# Altium PCB LCD PCB.PcbDoc
Units mm, origin at the board's own origin, x right, y up, seen from the top; angles counter-clockwise.
Board outline 100 x 62 mm, 2 copper layers (Top Layer, Bottom Layer), stack 1.621 mm thick; 2 components, 16 nets, 36 pads, 3 vias.
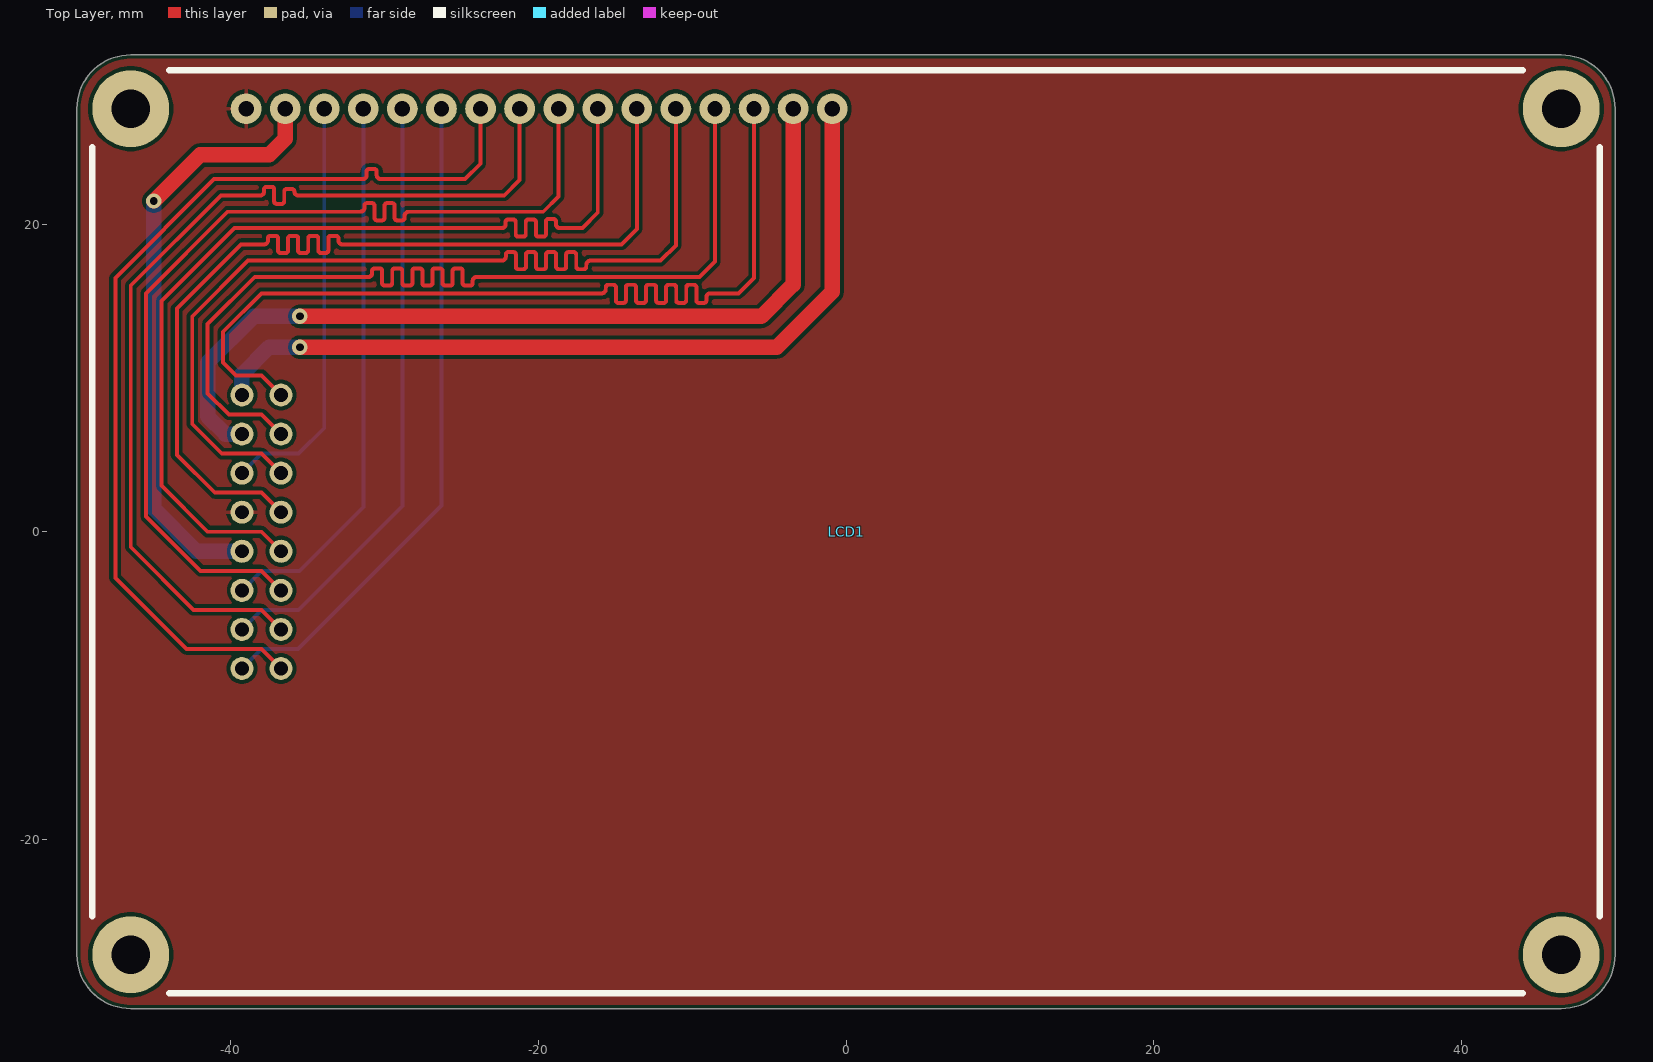
[diagram p0: Top Layer view]
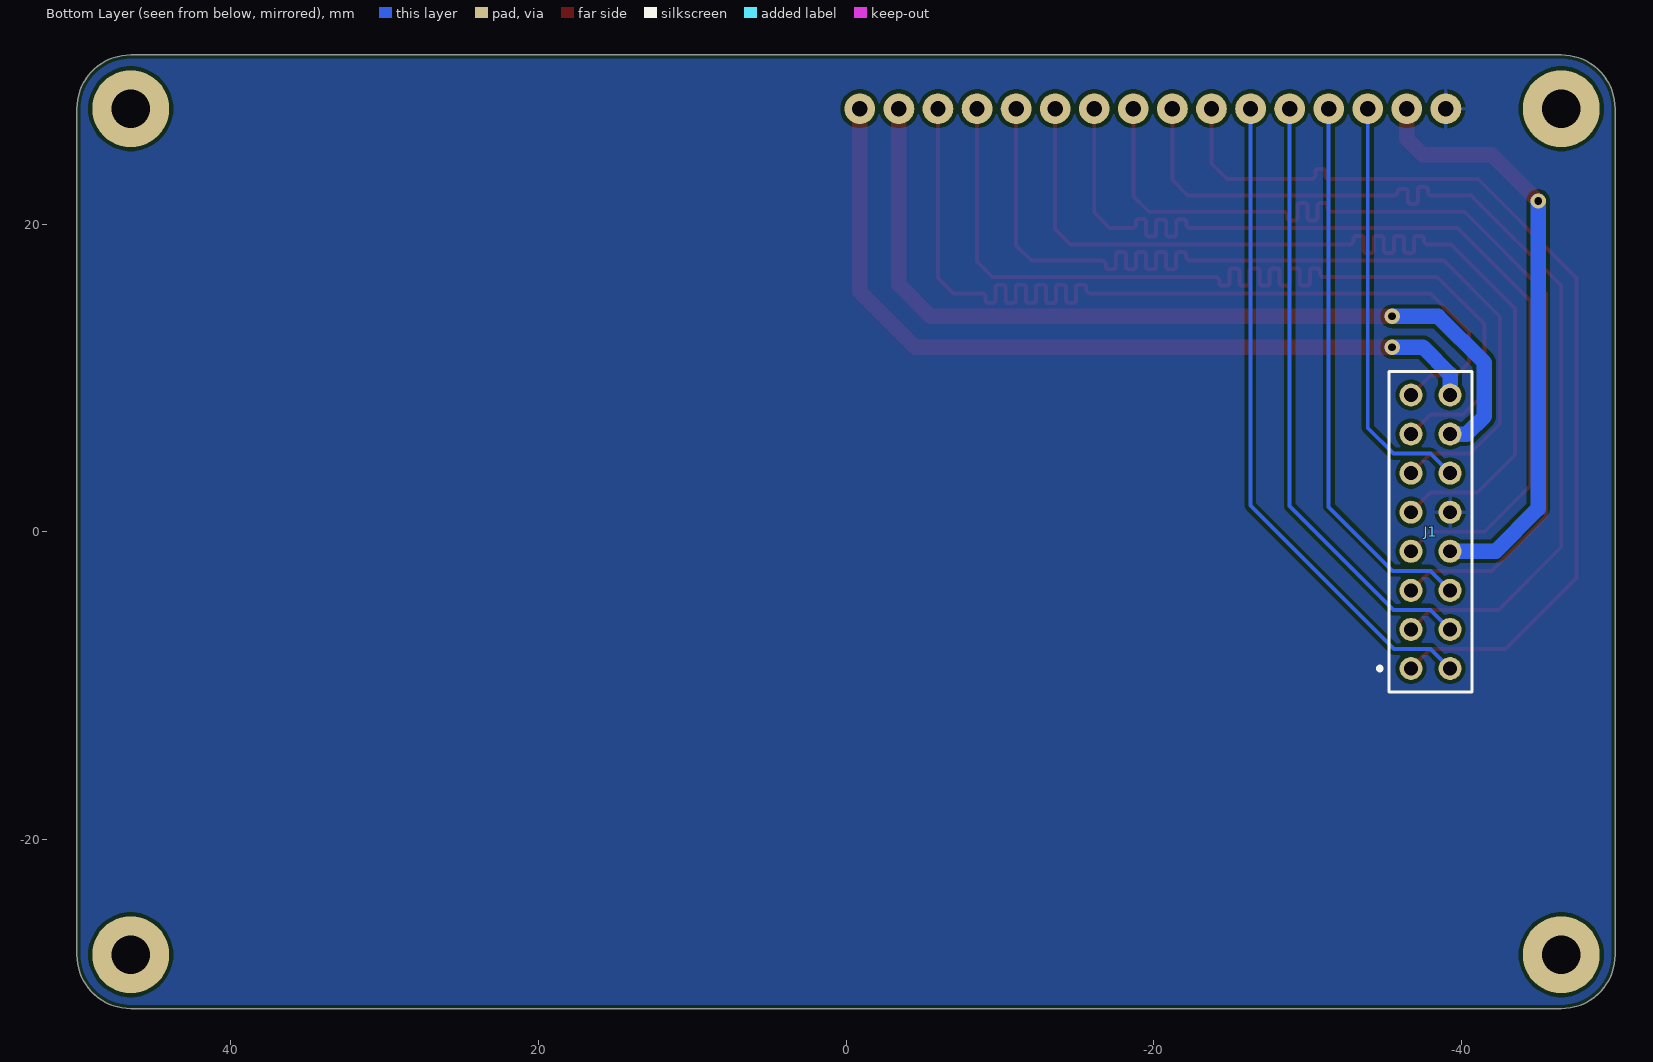
[diagram p1: Bottom Layer view, seen from below]

## Layer stack, top to bottom
Top Solder: solder mask 0.0102, Solder Resist, Dk 3.5
Top Layer: signal copper 0.0356
Dielectric 1: dielectric 1.55, FR-4, Dk 4.8
Bottom Layer: signal copper 0.0356
Bottom Solder: solder mask 0.0102, Solder Resist, Dk 3.5

## Board outline
-50,-27.5 ccw(c-46.5,-27.5) -46.5,-31 46.5,-31 ccw(c46.5,-27.5) 50,-27.5 50,27.5 ccw(c46.5,27.5) 46.5,31 -46.5,31 ccw(c-46.5,27.5) -50,27.5

## Design rules (kind name [scope] priority, off if disabled: settings)
BoardOutlineClearance [All] p1: gap=0.25 ignorepadtopadclearanceinfootprint=FALSE
Clearance [All] p1: gap=0.25 ignorepadtopadclearanceinfootprint=FALSE
HoleSize [All] p1: absolutevalues=TRUE maxlimit=2.5 minlimit=0.4 maxpercent=80.000 minpercent=20.000
PolygonConnect [All] p1: connectstyle=Relief reliefconductorwidth=0.25 reliefentries=4 polygonreliefangle="90 Angle" airgapwidth=0.25
RoutingVias [All] p1: holewidth=0.711 width=1.27 viastyle="Through Hole" minholewidth=0.711 minwidth=1.27 maxholewidth=0.711 maxwidth=1.27
SolderMaskExpansion SolderMaskExpansion_Via [IsVia] p1: expansion=0.102 istentingtop=TRUE
SolderMaskExpansion [All] p2: expansion=0.2 istentingtop=FALSE
Width [All] p1: maxlimit=2 minlimit=0.25 preferedwidth=0.25
29 further rules are at their usual default settings.

## Components (designator, comment, footprint, x,y, rotation, side; value= is the part's Value field where it differs from the comment)
J1 "PBC08DFAN" SULLINS_PBC08DFAN -38,0 r0 bottom
LCD1 "204G CC BC-3LP" "DISPLAYTECH_204G CC BC-3LP" 0,0 r0 top

## Footprints (in the part's own frame and the unit in brackets; to place one, negate y for a bottom-side part, rotate by r counter-clockwise, add the part's x,y. Pads: shape width x height; smd on the part's side, far side on the other; paste and mask are expansions set on the pad)
"DISPLAYTECH_204G CC BC-3LP" [mm]
  round 2 hole 1: 1(-39,27.5) 2(-36.46,27.5) 3(-33.92,27.5) 4(-31.38,27.5) 5(-28.84,27.5) 6(-26.3,27.5) 7(-23.76,27.5) 8(-21.22,27.5) 9(-18.68,27.5) 10(-16.14,27.5) 11(-13.6,27.5) 12(-11.06,27.5) 13(-8.52,27.5) 14(-5.98,27.5) 15(-3.44,27.5) 16(-0.9,27.5)
  round 5 hole 2.5: ""(-46.5,-27.5) ""(-46.5,27.5) ""(46.5,27.5) ""(46.5,-27.5)
  silkscreen extent -49,-30 49,30, body extent -49,-29.96 49,30.04, height 14.05
SULLINS_PBC08DFAN [mm]
  round 1.5 hole 0.9: 1(1.27,8.89) 2(-1.27,8.89) 3(1.27,6.35) 4(-1.27,6.35) 5(1.27,3.81) 6(-1.27,3.81) 7(1.27,1.27) 8(-1.27,1.27) 9(1.27,-1.27) 10(-1.27,-1.27) 11(1.27,-3.81) 12(-1.27,-3.81) 13(1.27,-6.35) 14(-1.27,-6.35) 15(1.27,-8.89) 16(-1.27,-8.89)
  silkscreen extent -2.7,-10.41 3.4,10.41, body extent -2.54,-10.16 2.54,10.16, height 10.48

## Part data
J1: library part "Term,Header,2x8 Pin,2.54mm,Top,Thru", "Connector Header Through Hole 16 position 0.100\" (2.54mm)", Manufacturer 1="Sullins Connector Solutions", Vendor 1 Part Number=S2211E-08-ND, CreatedBy="Judd Foster", HelpURL=https://s3.amazonaws.com/catalogspreads-pdf/PAGE112-113%20.100%20MALE%20HDR.pdf, Manufacturer 1 Part Number=PBC08DFAN, Part Name="Term,Header,2x8 Pin,2.54mm,Top,Thru", Vendor 1=DigiKey
LCD1: library part "Disp,Char,LCD,20x4,204G CC BC-3LP", "Character Display Module Transmissive 5 x 8 Dots STN - Super-Twisted Nematic LED - White 98.00mm x 60.00mm x 13.60mm", Manufacturer 1=Displaytech, Vendor 1 Part Number=1756-204GCCBC-3LP-ND, CreatedBy="Judd Foster", HelpURL=https://www.seacomp.com/sites/default/files/datasheets/204G-CC-BC-3LP-Displaytech-Spec.pdf, Manufacturer 1 Part Number="204G CC BC-3LP", Part Name="Disp,Char,LCD,20x4,204G CC BC-3LP", Vendor 1=DigiKey

## Via types
v1: diameter 1, hole 0.5, Top Layer to Bottom Layer, tented both sides, 3 vias

## Nets (pads, with @x,y where several pads share a name; then routed paths per layer and width w, separated by ;. In a path a pad name is that pad's centre, name@x,y a point inside that pad or via, vN(x,y) a via of type N, cw(c..) or ccw(c..) an arc to the next point about the centre after c; other vN are vias at no path point)
LCD.A: J1.14 LCD1.15 | length 57.8
  Top Layer w1: v1(-35.5,14) -5.5,14 -3.44,16.06 LCD1.15
  Bottom Layer w1: J1.14 -40.35,6.35 -41.5,7.5 -41.5,11 -38.5,14 v1(-35.5,14)
LCD.D0: J1.1 LCD1.7 | length 64.1
  Top Layer w0.254: J1.1 -38,-7.62 -42.88,-7.62 -47.5,-3 -47.5,16.5 -41.075,22.925 -31.545,22.925 -31.417,22.925 ccw(c-31.417,23.179) -31.163,23.179 -31.163,23.416 cw(c-31,23.416) -31,23.579 -30.673,23.579 cw(c-30.673,23.416) -30.509,23.416 -30.509,23.179 ccw(c-30.255,23.179) -30.255,22.925 -25.176,22.925 -24.76,22.925 -23.76,23.925 LCD1.7
LCD.D1: J1.3 LCD1.8 | length 64.2
  Top Layer w0.254: J1.3 -38,-5.08 -42.42,-5.08 -46.5,-1 -46.5,16 -40.636,21.864 -38.208,21.864 -38.081,21.864 ccw(c-38.081,22.118) -37.827,22.118 -37.827,22.257 cw(c-37.664,22.257) -37.664,22.421 -37.337,22.421 cw(c-37.337,22.257) -37.173,22.257 -37.173,21.478 ccw(c-37.01,21.478) -37.01,21.314 -36.683,21.314 ccw(c-36.683,21.478) -36.519,21.478 -36.519,22.118 cw(c-36.356,22.118) -36.356,22.281 -36.029,22.281 cw(c-36.029,22.118) -35.865,22.118 ccw(c-35.611,22.118) -35.611,21.864 -32.407,21.864 -22.22,21.864 -21.22,22.864 LCD1.8
LCD.D2: J1.5 LCD1.9 | length 64.1
  Top Layer w0.254: J1.5 -38,-2.54 -41.96,-2.54 -45.5,1 -45.5,15.5 -40.197,20.803 -31.689,20.803 -31.562,20.803 ccw(c-31.562,21.057) -31.308,21.057 -31.308,21.196 cw(c-31.144,21.196) -31.144,21.36 -30.817,21.36 cw(c-30.817,21.196) -30.654,21.196 -30.654,20.41 ccw(c-30.491,20.41) -30.491,20.247 -30.164,20.247 ccw(c-30.164,20.41) -30,20.41 -30,21.196 cw(c-29.837,21.196) -29.837,21.36 -29.51,21.36 cw(c-29.51,21.196) -29.346,21.196 -29.346,20.41 ccw(c-29.183,20.41) -29.183,20.247 -28.856,20.247 ccw(c-28.856,20.41) -28.692,20.41 -28.692,20.549 cw(c-28.438,20.549) -28.438,20.803 -27.094,20.803 -19.68,20.803 -18.68,21.803 LCD1.9
LCD.D3: J1.7 LCD1.10 | length 63.7
  Top Layer w0.254: J1.7 -38,0 -41.5,0 -44.5,3 -44.5,15 -39.757,19.743 -22.507,19.743 -22.379,19.743 ccw(c-22.379,19.997) -22.125,19.997 -22.125,20.136 cw(c-21.962,20.136) -21.962,20.299 -21.635,20.299 cw(c-21.635,20.136) -21.471,20.136 -21.471,19.349 ccw(c-21.308,19.349) -21.308,19.186 -20.981,19.186 ccw(c-20.981,19.349) -20.817,19.349 -20.817,20.136 cw(c-20.654,20.136) -20.654,20.299 -20.327,20.299 cw(c-20.327,20.136) -20.164,20.136 -20.164,19.349 ccw(c-20,19.349) -20,19.186 -19.673,19.186 ccw(c-19.673,19.349) -19.51,19.349 -19.51,20.166 cw(c-19.346,20.166) -19.346,20.329 -19.019,20.329 cw(c-19.019,20.166) -18.856,20.166 -18.856,19.997 ccw(c-18.602,19.997) -18.602,19.743 -17.951,19.743 -17.14,19.743 -16.14,20.743 LCD1.10
LCD.D4: J1.9 LCD1.11 | length 64.3
  Top Layer w0.254: J1.9 -38,2.54 -41.04,2.54 -43.5,5 -43.5,14.5 -39.318,18.682 -37.959,18.682 -37.832,18.682 ccw(c-37.832,18.936) -37.578,18.936 -37.578,19.075 cw(c-37.414,19.075) -37.414,19.239 -37.087,19.239 cw(c-37.087,19.075) -36.924,19.075 -36.924,18.289 ccw(c-36.76,18.289) -36.76,18.125 -36.433,18.125 ccw(c-36.433,18.289) -36.27,18.289 -36.27,19.075 cw(c-36.106,19.075) -36.106,19.239 -35.779,19.239 cw(c-35.779,19.075) -35.616,19.075 -35.616,18.289 ccw(c-35.452,18.289) -35.452,18.125 -35.125,18.125 ccw(c-35.125,18.289) -34.962,18.289 -34.962,19.075 cw(c-34.798,19.075) -34.798,19.239 -34.471,19.239 cw(c-34.471,19.075) -34.308,19.075 -34.308,18.289 ccw(c-34.144,18.289) -34.144,18.125 -33.817,18.125 ccw(c-33.817,18.289) -33.654,18.289 -33.654,19.075 cw(c-33.49,19.075) -33.49,19.239 -33.163,19.239 cw(c-33.163,19.075) -33,19.075 -33,18.936 ccw(c-32.746,18.936) -32.746,18.682 -32.109,18.682 -14.6,18.682 -13.6,19.682 LCD1.11
LCD.D5: J1.11 LCD1.12 | length 63.9
  Top Layer w0.254: J1.11 -38,5.08 -40.58,5.08 -42.5,7 -42.5,14 -38.879,17.621 -22.497,17.621 -22.37,17.621 ccw(c-22.37,17.875) -22.116,17.875 -22.116,18.014 cw(c-21.952,18.014) -21.952,18.178 -21.625,18.178 cw(c-21.625,18.014) -21.462,18.014 -21.462,17.228 ccw(c-21.298,17.228) -21.298,17.065 -20.971,17.065 ccw(c-20.971,17.228) -20.808,17.228 -20.808,18.014 cw(c-20.644,18.014) -20.644,18.178 -20.317,18.178 cw(c-20.317,18.014) -20.154,18.014 -20.154,17.228 ccw(c-19.99,17.228) -19.99,17.065 -19.663,17.065 ccw(c-19.663,17.228) -19.5,17.228 -19.5,18.014 cw(c-19.336,18.014) -19.336,18.178 -19.009,18.178 cw(c-19.009,18.014) -18.846,18.014 -18.846,17.228 ccw(c-18.683,17.228) -18.683,17.065 -18.356,17.065 ccw(c-18.356,17.228) -18.192,17.228 -18.192,18.014 cw(c-18.029,18.014) -18.029,18.178 -17.702,18.178 cw(c-17.702,18.014) -17.538,18.014 -17.538,17.228 ccw(c-17.375,17.228) -17.375,17.065 -17.048,17.065 ccw(c-17.048,17.228) -16.884,17.228 -16.884,17.367 cw(c-16.63,17.367) -16.63,17.621 -15.12,17.621 -12.06,17.621 -11.06,18.621 LCD1.12
LCD.D6: J1.13 LCD1.13 | length 64.5
  Top Layer w0.254: J1.13 -38,7.62 -40.12,7.62 -41.5,9 -41.5,13.5 -38.439,16.561 -31.189,16.561 -31.062,16.561 ccw(c-31.062,16.815) -30.808,16.815 -30.808,16.954 cw(c-30.644,16.954) -30.644,17.117 -30.317,17.117 cw(c-30.317,16.954) -30.154,16.954 -30.154,16.167 ccw(c-29.99,16.167) -29.99,16.004 -29.663,16.004 ccw(c-29.663,16.167) -29.5,16.167 -29.5,16.954 cw(c-29.336,16.954) -29.336,17.117 -29.01,17.117 cw(c-29.01,16.954) -28.846,16.954 -28.846,16.167 ccw(c-28.683,16.167) -28.683,16.004 -28.356,16.004 ccw(c-28.356,16.167) -28.192,16.167 -28.192,16.954 cw(c-28.029,16.954) -28.029,17.117 -27.702,17.117 cw(c-27.702,16.954) -27.538,16.954 -27.538,16.167 ccw(c-27.375,16.167) -27.375,16.004 -27.048,16.004 ccw(c-27.048,16.167) -26.884,16.167 -26.884,16.954 cw(c-26.721,16.954) -26.721,17.117 -26.394,17.117 cw(c-26.394,16.954) -26.23,16.954 -26.23,16.167 ccw(c-26.067,16.167) -26.067,16.004 -25.74,16.004 ccw(c-25.74,16.167) -25.576,16.167 -25.576,16.954 cw(c-25.413,16.954) -25.413,17.117 -25.086,17.117 cw(c-25.086,16.954) -24.922,16.954 -24.922,16.167 ccw(c-24.759,16.167) -24.759,16.004 -24.432,16.004 ccw(c-24.432,16.167) -24.268,16.167 -24.268,16.307 cw(c-24.014,16.307) -24.014,16.561 -23.527,16.561 -9.52,16.561 -8.52,17.561 LCD1.13
LCD.D7: J1.15 LCD1.14 | length 63.8
  Top Layer w0.254: J1.15 -38,10.16 -39.66,10.16 -40.5,11 -40.5,13 -38,15.5 -15.997,15.5 -15.87,15.5 ccw(c-15.87,15.754) -15.616,15.754 -15.616,15.893 cw(c-15.452,15.893) -15.452,16.057 -15.125,16.057 cw(c-15.125,15.893) -14.962,15.893 -14.962,15.041 ccw(c-14.798,15.041) -14.798,14.877 -14.471,14.877 ccw(c-14.471,15.041) -14.308,15.041 -14.308,15.893 cw(c-14.144,15.893) -14.144,16.057 -13.817,16.057 cw(c-13.817,15.893) -13.654,15.893 -13.654,15.041 ccw(c-13.49,15.041) -13.49,14.877 -13.163,14.877 ccw(c-13.163,15.041) -13,15.041 -13,15.893 cw(c-12.836,15.893) -12.836,16.057 -12.509,16.057 cw(c-12.509,15.893) -12.346,15.893 -12.346,15.041 ccw(c-12.183,15.041) -12.183,14.877 -11.856,14.877 ccw(c-11.856,15.041) -11.692,15.041 -11.692,15.893 cw(c-11.529,15.893) -11.529,16.057 -11.202,16.057 cw(c-11.202,15.893) -11.038,15.893 -11.038,15.041 ccw(c-10.875,15.041) -10.875,14.877 -10.548,14.877 ccw(c-10.548,15.041) -10.384,15.041 -10.384,15.893 cw(c-10.221,15.893) -10.221,16.057 -9.894,16.057 cw(c-9.894,15.893) -9.73,15.893 -9.73,15.041 ccw(c-9.567,15.041) -9.567,14.877 -9.24,14.877 ccw(c-9.24,15.041) -9.076,15.041 -9.076,15.246 cw(c-8.822,15.246) -8.822,15.5 -6.98,15.5 -6.834,15.646 -5.98,16.5 LCD1.14
LCD.E: J1.2 LCD1.6 | length 43.2
  Bottom Layer w0.254: J1.2 -38,-7.62 -35.62,-7.62 -26.3,1.7 LCD1.6
LCD.K: J1.16 LCD1.16 | length 53.8
  Top Layer w1: v1(-35.5,12) -4.5,12 -0.9,15.6 LCD1.16
  Bottom Layer w1: J1.16 -39.27,10.23 -37.5,12 v1(-35.5,12)
LCD.RS: J1.6 LCD1.4 | length 36
  Bottom Layer w0.254: J1.6 -38,-2.54 -35.54,-2.54 -31.38,1.62 LCD1.4
LCD.RW: J1.4 LCD1.5 | length 39.6
  Bottom Layer w0.254: J1.4 -38,-5.08 -35.58,-5.08 -28.84,1.66 LCD1.5
LCD.VDD: J1.8 LCD1.2 | length 39.1
  Top Layer w1: v1(-45,21.5) -42,24.5 -37.5,24.5 -36.46,25.54 LCD1.2
  Bottom Layer w1: v1(-45,21.5) -45,1.5 -42.23,-1.27 J1.8
LCD.VO: J1.12 LCD1.3 | length 27.3
  Bottom Layer w0.254: J1.12 -38,5.08 -35.583,5.08 -33.92,6.743 LCD1.3
LCD.VSS: J1.10 LCD1.1
pads on no net: LCD1.

## Polygon pours and split planes (outlines as drawn)
LCD.VSS on Top Layer "NONET_L-01_P-001" (solid, pour order 0): -50,-31 -50,31 50,31 50,-31
LCD.VSS on Bottom Layer "NONET_L-01_P-001" (solid, pour order 1): -50,-31 -50,31 50,31 50,-31

## Silkscreen, mask and mechanical layers (free items; w line width, h text height)
Mechanical 1:
  the board outline again, w0.1
Mechanical 13:
  lines w0.1: -39.27,-8.89 -39.27,-6.35